# Altium PCB PCB1.PcbDoc
Units mm, origin at the board's own origin, x right, y up, seen from the top; angles counter-clockwise.
Board outline 134.5 x 74 mm, 2 copper layers (Top Layer, Bottom Layer); 114 components, 125 nets, 590 pads, 0 vias.
Unrouted connection lines stored in the file: 341.
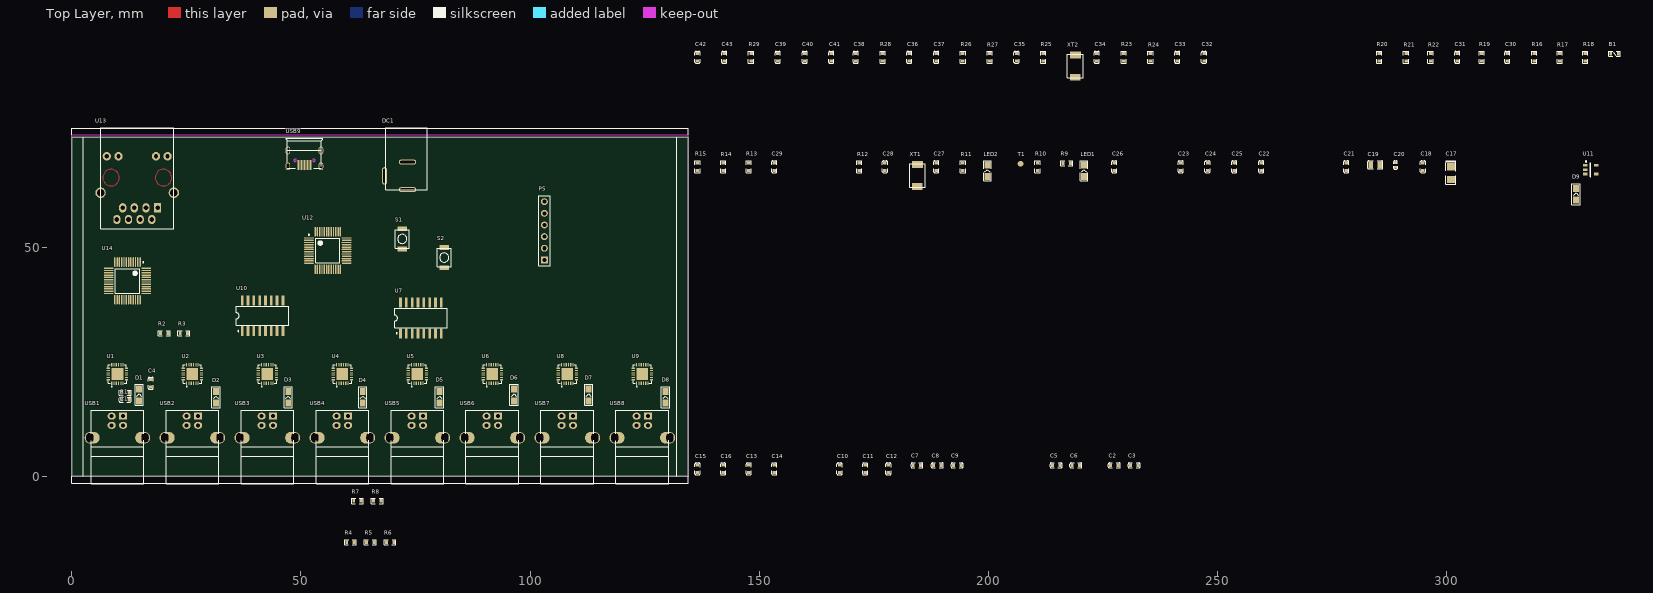
[diagram p0: Top Layer view]
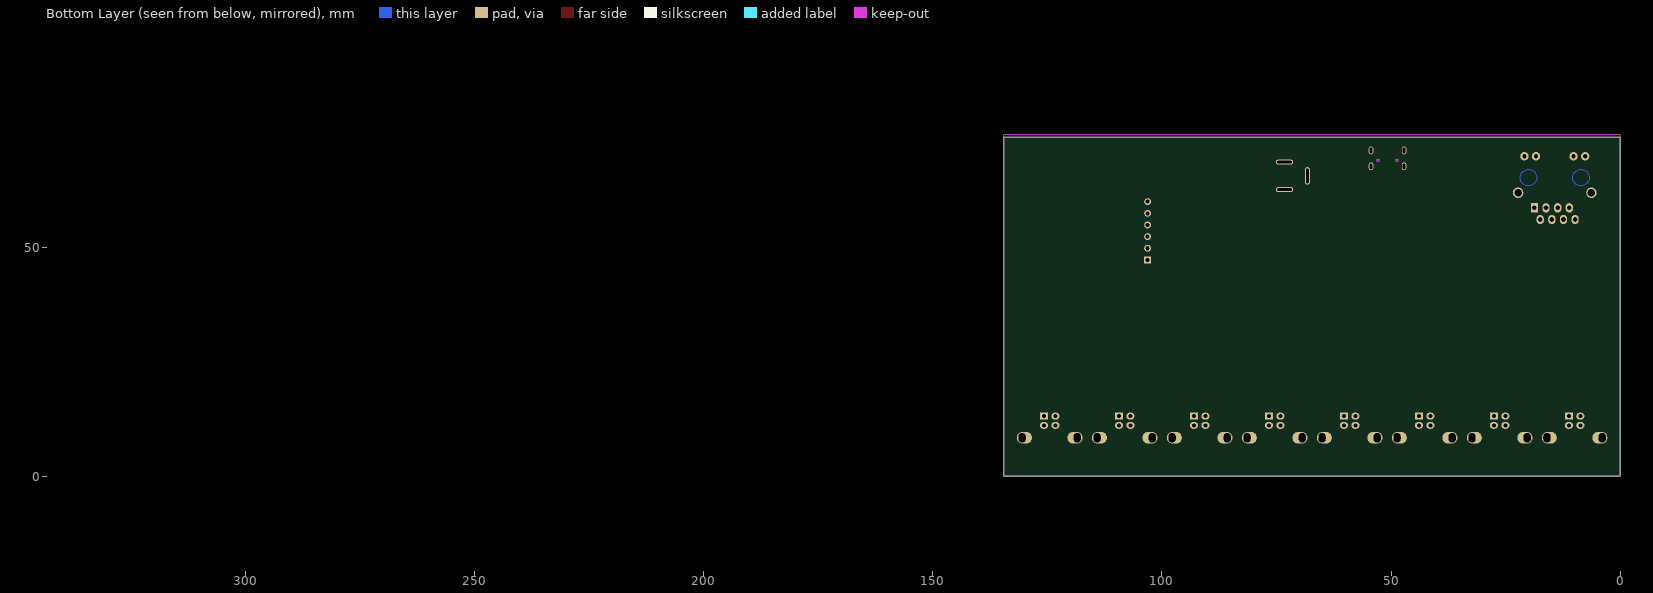
[diagram p1: Bottom Layer view, seen from below]

## Layer stack, top to bottom
Top Layer: signal copper 0.0356
Dielectric: dielectric 0.32, FR-4, Dk 4.8
Bottom Layer: signal copper 0.0356

## Board outline
0,0 134.5,0 134.5,74 0,74

## Design rules (kind name [scope] priority, off if disabled: settings)
Clearance [All] p1: gap=0.178
ComponentClearance [All] p1: gap=0 collisioncheckmode=3 verticalgap=0 showdistances=FALSE
HoleSize [All] p1: absolutevalues=TRUE maxlimit=25.4 minlimit=0.025 maxpercent=80.000 minpercent=20.000
HoleToHoleClearance [All] p1: gap=0.178 allowstackedmicrovias=TRUE
MinimumSolderMaskSliver [All] p1: minsoldermaskwidth=0
PolygonConnect [All] p1: connectstyle=Relief reliefconductorwidth=0.254 reliefentries=4 polygonreliefangle="90 Angle"
RoomDefinition U_W5500_1 [InComponentClass('U_W5500_1')] p1: confinementstyle=ConfineIn formatcopy=TRUE lockcomponents=FALSE outline -38.354,-31.623 12.446,-31.623 12.446,-6.223 -38.354,-6.223
RoomDefinition U_MCU_1 [InComponentClass('U_MCU_1')] p2: confinementstyle=ConfineIn formatcopy=TRUE lockcomponents=FALSE outline -38.354,-31.623 12.446,-31.623 12.446,-6.223 -38.354,-6.223
RoomDefinition U_8chUSBtoserial [InComponentClass('U_8chUSBtoserial')] p3: confinementstyle=ConfineIn formatcopy=TRUE lockcomponents=FALSE outline -38.354,-31.623 12.446,-31.623 12.446,-6.223 -38.354,-6.223
RoutingVias [All] p1: holewidth=0.356 width=0.559 viastyle="Through Hole" minholewidth=0.356 minwidth=0.559 maxholewidth=7.112 maxwidth=12.7
SilkToSilkClearance [All] p1: silktosilkclearance=0
SilkscreenOverComponentPads [All] p1: minsilkscreentomaskgap=0
SolderMaskExpansion [All] p1: expansion=0.102
TestPointUsage [All] p1: valid=0 allowmultiple=FALSE
Testpoint [All] p1: side=15 testpointundercomponent=TRUE minsize=1.016 maxsize=2.54 preferedsize=1.524 minholesize=0 maxholesize=1.016 preferedholesize=0.813 testpointgrid=0.025 style=1023 order=0123456789
Width [All] p1: maxlimit=2.54 minlimit=0.178 preferedwidth=0.178
18 further rules are at their usual default settings.

## Classes and differential pairs
component class U_W5500_1: B1 C30 C31 C32 C33 C34 C35 C36 C37 C38 C39 C40 C41 C42 C43 R16 R17 R18 R19 R20 R21 R22 R23 R24 R25 R26 R27 R28 R29 U13 U14 XT2
component class U_MCU_1: C17 C18 C19 C20 C21 C22 C23 C24 C25 C26 C27 C28 C29 D9 DC1 LED1 LED2 P5 R9 R10 R11 R12 R13 R14 R15 S1 S2 T1 U11 U12 USB9 XT1
component class U_8chUSBtoserial: C1 C2 C3 C4 C5 C6 C7 C8 C9 C10 C11 C12 C13 C14 C15 C16 D1 D2 D3 D4 D5 D6 D7 D8 R1 R2 R3 R4 R5 R6 R7 R8 U1 U2 U3 U4 U5 U6 U7 U8 U9 U10 USB1 USB2 USB3 USB4 USB5 USB6 USB7 USB8

## Components (designator, comment, footprint, x,y, rotation, side; value= is the part's Value field where it differs from the comment)
B1 "BEAD" 0603L 336.55,92.202 r0 top
C1 "1uF" 0603C 11.684,16.764 r0 top
C2 "1uF" 0603C 227.457,2.413 r0 top
C3 "1uF" 0603C 231.775,2.413 r0 top
C4 "1uF" 0603C 17.272,20.32 r270 top
C5 "1uF" 0603C 214.757,2.413 r0 top
C6 "1uF" 0603C 219.075,2.413 r0 top
C7 "1uF" 0603C 184.404,2.413 r0 top
C8 "1uF" 0603C 188.849,2.413 r0 top
C9 "1uF" 0603C 193.167,2.413 r0 top
C10 "1uF" 0603C 167.513,1.651 r90 top
C11 "1uF" 0603C 173.101,1.651 r90 top
C12 "1uF" 0603C 178.181,1.651 r90 top
C13 "1uF" 0603C 147.701,1.651 r90 top
C14 "1uF" 0603C 153.289,1.651 r90 top
C15 "1uF" 0603C 136.525,1.651 r90 top
C16 "1uF" 0603C 142.113,1.651 r90 top
C17 "10UF" 3216C 300.863,67.564 r90 top
C18 "104" 0603C 294.767,67.564 r90 top
C19 "10uF" 0805C 284.353,67.945 r0 top
C20 "0.1uF" 0402C 288.798,67.945 r90 top
C21 "104" 0603C 278.003,67.564 r90 top
C22 "104" 0603C 259.461,67.564 r90 top
C23 "104" 0603C 241.935,67.564 r90 top
C24 "104" 0603C 247.777,67.564 r90 top
C25 "104" 0603C 253.619,67.564 r90 top
C26 "104" 0603C 227.457,67.564 r90 top
C27 "22P" 0603C 188.595,67.564 r90 top
C28 "22P" 0603C 177.419,67.564 r90 top
C29 "104" 0603C 153.289,67.564 r90 top
C30 "104" 0603C 313.182,91.44 r90 top
C31 "104" 0603C 302.26,91.44 r90 top
C32 "104" 0603C 247.015,91.44 r90 top
C33 "104" 0603C 241.173,91.44 r90 top
C34 "22P" 0603C 223.647,91.44 r90 top
C35 "22P" 0603C 206.121,91.44 r90 top
C36 "104" 0603C 182.753,91.44 r90 top
C37 "105" 0603C 188.595,91.44 r90 top
C38 "104" 0603C 171.069,91.44 r90 top
C39 "104" 0603C 154.051,91.44 r90 top
C40 "104" 0603C 159.893,91.44 r90 top
C41 "104" 0603C 165.735,91.44 r90 top
C42 "105" 0603C 136.525,91.44 r90 top
C43 "104" 0603C 142.367,91.44 r90 top
D1 "SS14" SOD123 14.732,17.78 r90 top
D2 "SS14" SOD123 31.496,17.272 r90 top
D3 "SS14" SOD123 47.244,17.272 r90 top
D4 "SS14" SOD123 63.5,17.272 r90 top
D5 "SS14" SOD123 80.264,17.272 r90 top
D6 "SS14" SOD123 96.52,17.78 r90 top
D7 "SS14" SOD123 112.776,17.78 r90 top
D8 "SS14" SOD123 129.54,17.272 r90 top
D9 "D-S" SOD123 328.168,61.595 r90 top
DC1 "DC" DC005 68.58,76.073 r270 top
LED1 "LED" 0805D 220.853,66.675 r90 top
LED2 "LED" 0805D 199.771,66.675 r90 top
P5 "SWD" HDR1X6 103.124,47.244 r90 top
R1 "5.1K" 0603R 11.684,18.288 r0 top
R2 "5.1K" 0603R 20.193,31.242 r0 top
R3 "5.1K" 0603R 24.511,31.242 r0 top
R4 "5.1K" 0603R 60.833,-14.351 r0 top
R5 "5.1K" 0603R 65.151,-14.351 r0 top
R6 "5.1K" 0603R 69.469,-14.351 r0 top
R7 "5.1K" 0603R 62.357,-5.334 r0 top
R8 "5.1K" 0603R 66.675,-5.334 r0 top
R9 "1.5K" 0603R 217.043,68.326 r0 top
R10 "10K" 0603R 210.693,67.564 r90 top
R11 "1.5K" 0603R 194.437,67.564 r90 top
R12 "10K" 0603R 171.831,67.564 r90 top
R13 "22R" 0603R 147.701,67.564 r90 top
R14 "22R" 0603R 142.113,67.564 r90 top
R15 "1.5K" 0603R 136.525,67.564 r90 top
R16 "10K" 0603R 319.024,91.44 r90 top
R17 "10K" 0603R 324.612,91.44 r90 top
R18 "10K" 0603R 330.2,91.44 r90 top
R19 "10K" 0603R 307.594,91.44 r90 top
R20 "50R" 0603R 285.242,91.44 r90 top
R21 "50R" 0603R 291.084,91.44 r90 top
R22 "50R" 0603R 296.418,91.44 r90 top
R23 "50R" 0603R 229.489,91.44 r90 top
R24 "50R" 0603R 235.331,91.44 r90 top
R25 "1M" 0603R 211.963,91.44 r90 top
R26 "1.5K" 0603R 194.437,91.44 r90 top
R27 "1.5K" 0603R 200.279,91.44 r90 top
R28 "12.4K%1" 0603R 176.911,91.44 r90 top
R29 "10K" 0603R 148.209,91.44 r90 top
S1 "BUTTON" SW-3X4X2 72.136,51.816 r90 top
S2 "BUTTON" SW-3X4X2 81.28,47.752 r90 top
T1 "TP" TP1 207.01,68.199 r0 top
U1 "CP2104" QFN24 10,22.352 r90 top
U2 "CP2104" QFN24 26.357,22.352 r90 top
U3 "CP2104" QFN24 42.714,22.352 r90 top
U4 "CP2104" QFN24 59.071,22.352 r90 top
U5 "CP2104" QFN24 75.429,22.352 r90 top
U6 "CP2104" QFN24 91.786,22.352 r90 top
U7 "CD4051" SOP16 76.2,34.544 r0 top
U8 "CP2104" QFN24 108.143,22.352 r90 top
U9 "CP2104" QFN24 124.5,22.352 r90 top
U10 "CD4051" SOP16 41.656,35.052 r0 top
U11 "MIC5219" SOT23-5 331.343,66.929 r0 top
U12 "STM32F103" LQFP48 55.88,49.276 r0 top
U13 "HR911105" HR911105A 14.732,69.487 r90 top
U14 "W5500" LQFP48 12.192,42.672 r270 top
USB1 "USB-B" USB-B 10,8.449 r90 top
USB2 "USB-B" USB-B 26.357,8.449 r90 top
USB3 "USB-B" USB-B 42.714,8.449 r90 top
USB4 "USB-B" USB-B 59.071,8.449 r90 top
USB5 "USB-B" USB-B 75.429,8.449 r90 top
USB6 "USB-B" USB-B 91.786,8.449 r90 top
USB7 "USB-B" USB-B 108.143,8.449 r90 top
USB8 "USB-B" USB-B 124.5,8.449 r90 top
USB9 "USB-Micro" USB-Micro-2 50.8,71.12 r270 top
XT1 "8M" 5032 184.531,65.659 r90 top
XT2 "25M" 5032 218.948,89.535 r90 top

## Footprints (in the part's own frame and the unit in brackets; to place one, negate y for a bottom-side part, rotate by r counter-clockwise, add the part's x,y. Pads: shape width x height; smd on the part's side, far side on the other; paste and mask are expansions set on the pad)
0402C [mm]
  rect 0.6x0.65 smd: 1(-0.508,0) 2(0.508,0)
  silkscreen extent -0.91,-0.43 0.91,0.43
0603C [mil]
  rect 25x30 smd: 1(-32,0) 2(32,0)
  silkscreen extent -51,-22 51,22
0603L [mil]
  rect 25x30 smd: 1(-32,0) 2(32,0)
  silkscreen extent -51,-22 51,22
0603R [mil]
  rect 25x30 smd: 1(-32,0) 2(32,0)
  silkscreen extent -51,-22 51,22
0805C [mm]
  rect 1x1.45 smd: 1(-0.95,0) 2(0.95,0)
  silkscreen extent -1.64,-0.86 1.64,0.89
0805D [mm]
  rect 1.524x1.25 smd: A(-1.27,0) K(1.27,0)
  silkscreen extent -2.16,-0.79 2.18,0.81
3216C [mm] "A型"
  rect 1.6x1.8 smd: 1(0,0) 2(-2.8,0)
  silkscreen extent -3.78,-1.17 1.4,1.19
5032 [mm]
  rect 1.5x2.3 smd: 1(-2.438,0.025)
  rect 1.5x2.4 smd: 2(2.388,0)
  silkscreen extent -2.59,-1.7 2.59,1.75
DC005 [mm] "9*13.5*10( 外径5.5mm 内径2.1mm)"
  oval 1.1x3.8 hole 0.5 slot 3.2 at 90 deg: 1(13.5,4.7) 2(7.5,4.7)
  oval 3.8x1.1 hole 0.5 slot 3.2 at 0 deg: 3(10.5,-0.3)
  silkscreen extent 0,0 13.5,9
HDR1X6 [mm]
  rect 1.5x1.5 hole 0.9: 1(0,0)
  round 1.5 hole 0.9: 2(2.54,0) 3(5.08,0) 4(7.62,0) 5(10.16,0) 6(12.7,0)
  silkscreen extent -1.27,-1.27 13.97,1.27
HR911105A [mil] "HR911105A"
  rect 80x62 hole 40: 1(-429,-159)
  oval 80x62 hole 40: 2(-529,-109) 3(-429,-59) 4(-529,-9) 5(-429,41) 6(-529,91) 7(-429,141) 8(-529,191)
  round 72 hole 36: 9(13.91,-244.63) 10(13.91,-145) 11(13.91,176.87) 12(13.91,277)
  round 90 hole 65: 13(-299.08,-298.76) 14(-299.08,331.16)
  Multi-Layer circle w5: c-169,-209 r70.8
  Multi-Layer circle w5: c-169,241 r70.8
  silkscreen extent -608,-299 258,331
LQFP48 [mm]
  oval 2.1x0.3 smd: 1(-4.1,2.75) 2(-4.1,2.25) 3(-4.1,1.75) 4(-4.1,1.25) 5(-4.1,0.75) 6(-4.1,0.25) 7(-4.1,-0.25) 8(-4.1,-0.75) 9(-4.1,-1.25) 10(-4.1,-1.75) 11(-4.1,-2.25) 12(-4.1,-2.75) 25(4.1,-2.75) 26(4.1,-2.25) 27(4.1,-1.75) 28(4.1,-1.25) 29(4.1,-0.75) 30(4.1,-0.25) 31(4.1,0.25) 32(4.1,0.75) 33(4.1,1.25) 34(4.1,1.75) 35(4.1,2.25) 36(4.1,2.75)
  oval 0.3x2.1 smd: 13(-2.75,-4.1) 14(-2.25,-4.1) 15(-1.75,-4.1) 16(-1.25,-4.1) 17(-0.75,-4.1) 18(-0.25,-4.1) 19(0.25,-4.1) 20(0.75,-4.1) 21(1.25,-4.1) 22(1.75,-4.1) 23(2.25,-4.1) 24(2.75,-4.1) 37(2.75,4.1) 38(2.25,4.1) 39(1.75,4.1) 40(1.25,4.1) 41(0.75,4.1) 42(0.25,4.1) 43(-0.25,4.1) 44(-0.75,4.1) 45(-1.25,4.1) 46(-1.75,4.1) 47(-2.25,4.1) 48(-2.75,4.1)
  silkscreen extent -4.22,-2.65 2.65,3.57
QFN24 [mm]
  rect 0.7x0.25 smd: 1(-2,1.25) 2(-2,0.75) 3(-2,0.25) 4(-2,-0.25) 5(-2,-0.75) 6(-2,-1.25) 13(2,-1.25) 14(2,-0.75) 15(2,-0.25) 16(2,0.25) 17(2,0.75) 18(2,1.25)
  rect 0.25x0.7 smd: 7(-1.25,-2) 8(-0.75,-2) 9(-0.25,-2) 10(0.25,-2) 11(0.75,-2) 12(1.25,-2) 19(1.25,2) 20(0.75,2) 21(0.25,2) 22(-0.25,2) 23(-0.75,2) 24(-1.25,2)
  rect 2.55x2.55 smd: 25(0,0)
  silkscreen extent -2.83,-2.01 2.01,2.01
SOD123 [mm]
  rect 1.524x1.25 smd: A(-1.27,0) K(1.27,0)
  silkscreen extent -2.29,-0.89 2.29,0.89
SOP16 [mm] "Small Outline; 16 Leads; Body Width 5.6 mm; Pitch 1.27 mm"
  rect 0.6x2.2 smd: 1(-4.445,-3.321) 2(-3.175,-3.321) 3(-1.905,-3.321) 4(-0.635,-3.321) 5(0.635,-3.321) 6(1.905,-3.321) 7(3.175,-3.321) 8(4.445,-3.321) 9(4.445,3.371) 10(3.175,3.371) 11(1.905,3.371) 12(0.635,3.371) 13(-0.635,3.371) 14(-1.905,3.371) 15(-3.175,3.371) 16(-4.445,3.371)
  silkscreen extent -5.73,-3.45 5.73,2.1
SOT23-5 [mm] "SOT23, 5-Leads, Body 3.0x2.6mm (max), Pitch 0.95mm, IPC Medium Density"
  rect 1x0.55 smd: 1(-1.2,0.95) 2(-1.2,0) 3(-1.2,-0.95) 4(1.2,-0.95) 5(1.2,0.95)
  silkscreen extent -1.12,-1.5 0.05,1.9
SW-3X4X2 [mm] "3X4X2 小龟二脚开关按键"
  rect 1x2 smd: 1(-2.2,0) 2(2.2,0)
  silkscreen extent -2,-1.5 2,1.5
TP1 [mm]
  round 1.27 smd: 1(0,0)
USB-B [mil]
  oval 100x130 hole 60 slot 80 at 0 deg copper offset 0,-20: 0(0,237.01)
  oval 100x130 hole 60 slot 80 at 0 deg copper offset 0,20: 0(0,-237.01)
  rect 60x70 hole 35: 1(185.43,-49.21)
  oval 60x70 hole 35: 2(185.43,49.21) 3(106.69,49.21) 4(106.69,-49.21)
  silkscreen extent -394,-226 236,226
USB-Micro-2 [mm]
  oval 1.7x1 hole 0.5 slot 1.2 at 0 deg: 0(0,3.6) 0(0,-3.6) 0(3.47,3.6) 0(3.47,-3.6)
  rect 2.15x0.4 smd: 1(3.16,1.3) 2(3.16,0.65) 3(3.16,0) 4(3.16,-0.65) 5(3.16,-1.3)
  Keep-Out Layer circle w0.178: c2.15,2.05 r0.275
  Keep-Out Layer circle w0.178: c2.15,-2.05 r0.275
  silkscreen extent -2.62,-4 3.87,4

## Part data
B1: "磁珠"
C1 C2 C3 C4 C5 C6 C7 C8 C9 C10 C11 C12 C13 C14 C15 C16 C18 C19 C20 C21 C22 C23 C24 C25 C26 C27 C28 C29 C30 C31 C32 C33 C34 C35 C36 C37 C38 C39 C40 C41 C42 C43: library part CAP, "普通小电容"
C17: library part CAP-T, "钽电容"
D1 D2 D3 D4 D5 D6 D7 D8: library part D-S, "肖特基二极管"
D9: "肖特基二极管"
DC1: library part DC00X, "圆形电源接口"
P5: "单片机端"
R1 R2 R3 R4 R5 R6 R7 R8 R9 R10 R11 R12 R13 R14 R15 R16 R17 R18 R19 R20 R21 R22 R23 R24 R25 R26 R27 R28 R29: library part RES, "普通电阻"
T1: "testpoint"
U7 U10: "模拟多路复用器"
USB1 USB2 USB3 USB4 USB5 USB6 USB7 USB8 USB9: "USB 1.1, Right Angle, SMT, A Type, Plug, 4 Position, Natural"
XT1 XT2: library part XT, "晶振"

## Nets (pads, with @x,y where several pads share a name; then routed paths per layer and width w, separated by ;. In a path a pad name is that pad's centre, name@x,y a point inside that pad or via, vN(x,y) a via of type N, cw(c..) or ccw(c..) an arc to the next point about the centre after c; other vN are vias at no path point)
A3V3: B1.2 C30.1 C39.2 C40.2 C41.2 R20.2 R21.2 R22.2 U14.4 U14.8 U14.11 U14.15 U14.17 U14.21
ACTLED: U13.11 U14.27
D3V3: B1.1 C17.1 C18.2 C22.2 C23.2 C24.1 C25.2 C36.1 C37.1 R10.1 R12.1 R15.2 R16.2 R17.2 R18.2 R19.2 R26.1 R27.1 U11.5 U12.1 U12.9 U12.24 U12.36 U12.48 U14.28
D5V: C4.2 C5.2 C6.2 C10.2 C11.2 C12.2 C15.2 C16.2 C19.1 C20.1 D1.K D2.K D3.K D4.K D5.K D6.K D7.K D8.K D9.K P5.1 U1.7 U1.8 U2.7 U2.8 U3.7 U3.8 U4.7 U4.8 U5.7 U5.8 U6.7 U6.8 U7.16 U8.7 U8.8 U9.7 U9.8 U10.16 U11.1 U11.3 USB9.1
GND: C1.2 C2.2 C3.2 C4.1 C5.1 C6.1 C7.2 C8.2 C9.2 C10.1 C11.1 C12.1 C13.2 C14.2 C15.1 C16.1 C17.2 C18.1 C19.2 C20.2 C21.2 C22.1 C23.1 C24.2 C25.1 C26.2 C27.2 C28.2 C29.1 C30.2 C31.1 C34.1 C35.2 C36.2 C37.2 C38.2 C39.1 C40.1 C41.1 C42.1 C43.1 DC1.2 DC1.3 LED1.K LED2.K P5.6 R28.2 R29.1 S1.1 S2.2 U1.2 U1.25 U2.2 U2.25 U3.2 U3.25 U4.2 U4.25 U5.2 U5.25 U6.2 U6.25 U7.6 U7.7 U7.8 U8.2 U8.25 U9.2 U9.25 U10.6 U10.7 U10.8 U11.2 U12.8 U12.23 U12.35 U12.44 U12.47 U13.13 U14.3 U14.9 U14.14 U14.16 U14.19 U14.29 U14.38 U14.39 U14.40 U14.41 U14.42 U14.48 USB1.0 USB1.4 USB2.0 USB2.4 USB3.0 USB3.4 USB4.0 USB4.4 USB5.0 USB5.4 USB6.0 USB6.4 USB7.0 USB7.4 USB8.0 USB8.4 USB9.0 USB9.5
LINKLED: U13.10 U14.25
NetC1_1: C1.1 R1.1 U1.5 U1.6
NetC2_1: C2.1 R2.1 U2.5 U2.6
NetC3_1: C3.1 R3.1 U3.5 U3.6
NetC7_1: C7.1 R4.1 U4.5 U4.6
NetC8_1: C8.1 R5.1 U5.5 U5.6
NetC9_1: C9.1 R6.1 U6.5 U6.6
NetC13_1: C13.1 R7.1 U8.5 U8.6
NetC14_1: C14.1 R8.1 U9.5 U9.6
NetC21_1: C21.1 U11.4
NetC27_1: C27.1 U12.5 XT1.1
NetC28_1: C28.1 U12.6 XT1.2
NetC32_1: C32.1 U13.3
NetC33_1: C33.1 U13.6
NetC34_2: C34.2 R25.2 U14.31 XT2.2
NetC35_1: C35.1 R25.1 U14.30 XT2.1
NetC42_2: C42.2 U14.20
NetC43_2: C43.2 U14.22
NetD1_A: D1.A USB1.1
NetD2_A: D2.A USB2.1
NetD3_A: D3.A USB3.1
NetD4_A: D4.A USB4.1
NetD5_A: D5.A USB5.1
NetD6_A: D6.A USB6.1
NetD7_A: D7.A USB7.1
NetD8_A: D8.A USB8.1
NetD9_A: D9.A DC1.1
NetLED1_A: LED1.A R9.2
NetLED2_A: LED2.A R11.2
NetR1_2: R1.2 U1.9
NetR2_2: R2.2 U2.9
NetR3_2: R3.2 U3.9
NetR4_2: R4.2 U4.9
NetR5_2: R5.2 U5.9
NetR6_2: R6.2 U6.9
NetR7_2: R7.2 U8.9
NetR8_2: R8.2 U9.9
NetR13_2: R13.2 USB9.2
NetR14_2: R14.2 USB9.3
NetR16_1: R16.1 U14.45
NetR17_1: R17.1 U14.44
NetR18_1: R18.1 U14.43
NetR26_2: R26.2 U13.9
NetR27_2: R27.2 U13.12
NetR28_1: R28.1 U14.10
NetR29_2: R29.2 U14.23
NetU1_3: U1.3 USB1.3
NetU1_4: U1.4 USB1.2
NetU2_3: U2.3 USB2.3
NetU2_4: U2.4 USB2.2
NetU3_3: U3.3 USB3.3
NetU3_4: U3.4 USB3.2
NetU4_3: U4.3 USB4.3
NetU4_4: U4.4 USB4.2
NetU5_3: U5.3 USB5.3
NetU5_4: U5.4 USB5.2
NetU6_3: U6.3 USB6.3
NetU6_4: U6.4 USB6.2
NetU8_3: U8.3 USB7.3
NetU8_4: U8.4 USB7.2
NetU9_3: U9.3 USB8.3
NetU9_4: U9.4 USB8.2
PA0: U7.11 U10.11 U12.10
PA1: U7.10 U10.10 U12.11
PA2: U7.3 U12.12
PA3: U10.3 U12.13
PA4: U7.9 U10.9 U12.14
PA5: U12.15
PA6: U12.16
PA7: U12.17
PA8: C29.2 R12.2 S2.1 U12.29
PA9: P5.3 U12.30
PA10: P5.2 U12.31
PA11: R13.1 U12.32
PA12: R14.1 R15.1 U12.33
PA13: P5.4 U12.34
PA14: P5.5 U12.37
PA15: U12.38
PB0: U12.18
PB1: U12.19
PB2: U12.20
PB3: U12.39
PB4: U12.40
PB5: U12.41
PB6: U12.42
PB7: U12.43
PB8: R9.1 U12.45
PB9: R11.1 U12.46
PB10: U12.21
PB11: U12.22
PB12: U12.25
PB13: U12.26 U14.33
PB14: U12.27 U14.34
PB15: U12.28 U14.35
PC13: U12.2 U14.32
PC14: R19.1 U12.3 U14.37
PC15: U12.4 U14.36
RCT: C38.1 R23.2 R24.2 U13.5
RST: C26.1 R10.2 S1.2 T1.1 U12.7
RXD1: U1.20 U7.13
RXD2: U2.20 U7.14
RXD3: U3.20 U7.15
RXD4: U4.20 U7.12
RXD5: U5.20 U7.1
RXD6: U6.20 U7.5
RXD7: U7.2 U8.20
RXD8: U7.4 U9.20
RXN: C33.2 R24.1 U14.5
RXP: C32.2 R23.1 U14.6
TCT: C31.2 R22.1 U13.4
TXD1: U1.21 U10.13
TXD2: U2.21 U10.14
TXD3: U3.21 U10.15
TXD4: U4.21 U10.12
TXD5: U5.21 U10.1
TXD6: U6.21 U10.5
TXD7: U8.21 U10.2
TXD8: U9.21 U10.4
TXN: R21.1 U13.2 U14.1
TXP: R20.1 U13.1 U14.2
pads on no net: U1.1 U1.10 U1.11 U1.12 U1.13 U1.14 U1.15 U1.16 U1.17 U1.18 U1.19 U1.22 U1.23 U1.24 U2.1 U2.10 U2.11 U2.12 U2.13 U2.14 U2.15 U2.16 U2.17 U2.18 U2.19 U2.22 U2.23 U2.24 U3.1 U3.10 U3.11 U3.12 U3.13 U3.14 U3.15 U3.16 U3.17 U3.18 U3.19 U3.22 U3.23 U3.24 U4.1 U4.10 U4.11 U4.12 U4.13 U4.14 U4.15 U4.16 U4.17 U4.18 U4.19 U4.22 U4.23 U4.24 U5.1 U5.10 U5.11 U5.12 U5.13 U5.14 U5.15 U5.16 U5.17 U5.18 U5.19 U5.22 U5.23 U5.24 U6.1 U6.10 U6.11 U6.12 U6.13 U6.14 U6.15 U6.16 U6.17 U6.18 U6.19 U6.22 U6.23 U6.24 U8.1 U8.10 U8.11 U8.12 U8.13 U8.14 U8.15 U8.16 U8.17 U8.18 U8.19 U8.22 U8.23 U8.24 U9.1 U9.10 U9.11 U9.12 U9.13 U9.14 U9.15 U9.16 U9.17 U9.18 U9.19 U9.22 U9.23 U9.24 U13.7 U13.8 U13.14 U14.7 U14.12 U14.13 U14.18 U14.24 U14.26 U14.46 U14.47 USB9.4

## Keep-outs
Keep-Out Layer:
  lines w0.254: 0,0 134.5,0 134.5,74.5 0,74.5 0,0

## Silkscreen, mask and mechanical layers (free items; w line width, h text height)
Top Overlay:
  lines w0.254: 0,0 0,-1.5 134.5,-1.5 ; 0,74.5 0,75.993 ; 0,76 134.5,76 134.5,74.5 ; 2.5,0 2.5,74 ; 132,0 132,74 ; 134.5,-1.493 134.5,0